# Altium PCB proto-rev0.PcbDoc (part 2 of 2)
Units mm, origin at the board's own origin, x right, y up, seen from the top; angles counter-clockwise.
Board outline 70 x 100 mm, 2 copper layers (Top Layer, Bottom Layer); 218 components, 156 nets, 639 pads, 222 vias.
Unrouted connection lines stored in the file: 43.
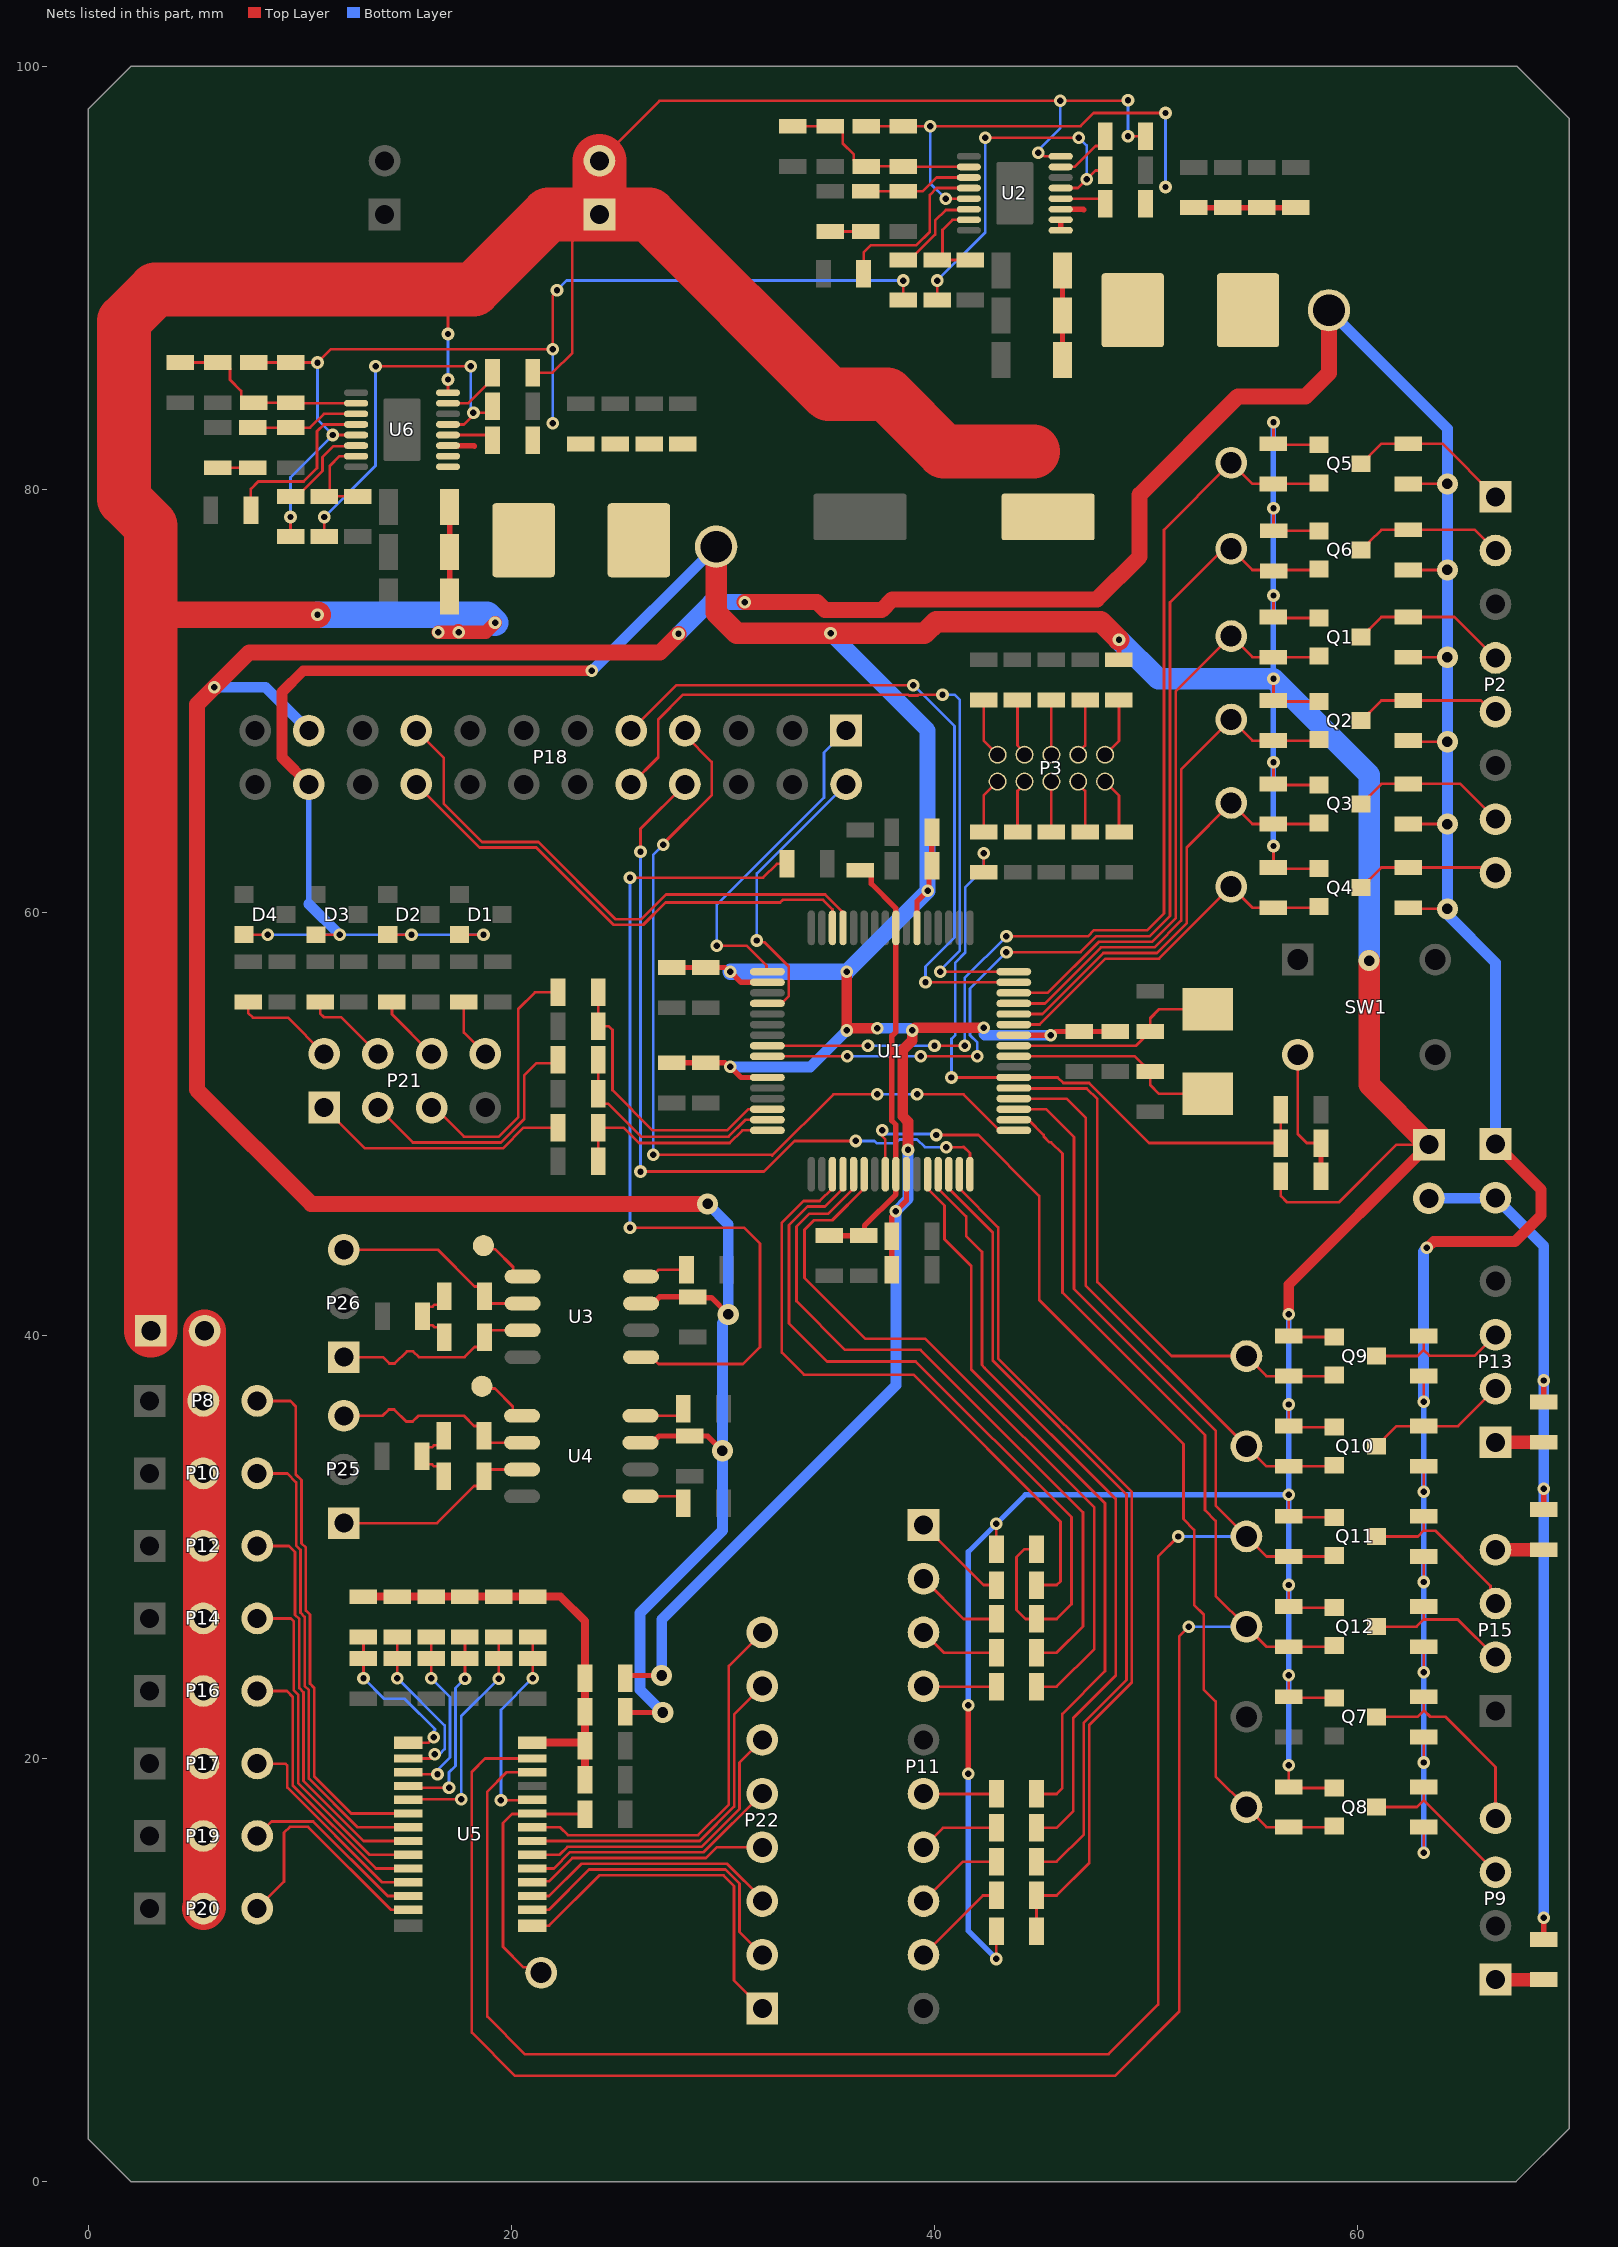
[diagram p2: the nets of this part, all layers, seen from the top]

## Via types
v1: diameter 0.6, hole 0.3, Top Layer to Bottom Layer, 204 vias
v2: diameter 1, hole 0.5, Top Layer to Bottom Layer, 14 vias
v3: diameter 5, hole 3.1, Top Layer to Bottom Layer, 4 vias

## Nets (pads, with @x,y where several pads share a name; then routed paths per layer and width w, separated by ;. In a path a pad name is that pad's centre, name@x,y a point inside that pad or via, vN(x,y) a via of type N, cw(c..) or ccw(c..) an arc to the next point about the centre after c; other vN are vias at no path point) (continued)
I2C1SDA: Q8.2 R44.1 TP10.1 U1.24 | length 48.5
  Top Layer w0.127: v1(37.525,49.7) 37.525,49.424 37.675,49.274 U1.24@37.675,47.625 ; v1(40.077,49.477) 42.073,49.477 44.95,46.6 44.95,41.691 51.772,34.869 51.772,31.323 52.28,30.815 52.28,27.268 52.728,26.82 52.728,23.274 53.296,22.706 53.296,19.159 TP10.1@54.75,17.705 55.7,16.755 R44.1@56.75,16.755 58.85,16.755 Q8.2@58.9,16.805
  Bottom Layer w0.127: v1(37.525,49.7) 37.525,49.525 40.029,49.525 v1(40.077,49.477)
I2C3SCL: Q9.2 R46.1 TP11.1 U1.37 | length 25.9
  Top Layer w0.127: U1.37@43.75,51.7 43.77,51.68 47.195,51.68 47.7,51.175 47.7,42.533 51.203,39.03 TP11.1@54.75,39.03 55.7,38.08 R46.1@56.75,38.08 Q9.2@58.9,38.08
I2C3SDA: Q10.2 R47.1 TP12.1 U1.36 | length 27
  Top Layer w0.127: U1.36@43.75,51.2 46.25,51.2 47.15,50.3 47.15,42.365 TP12.1@54.75,34.765 55.7,33.815 R47.1@56.75,33.815 Q10.2@58.9,33.815
I2C4SCL: Q11.2 R50.1 TP13.1 U1.35 U5.26 | length 102.5
  Top Layer w0.127: U5.26@20.975,19.35 19.775,19.35 18.858,18.433 18.858,7.792 20.625,6.025 48.232,6.025 50.575,8.368 50.575,29.55 v1(51.525,30.5) ; U1.35@43.75,50.7 45.275,50.7 46.6,49.375 46.6,42.197 53.296,35.501 53.296,31.954 TP13.1@54.75,30.5 55.7,29.55 R50.1@56.75,29.55 Q11.2@58.9,29.55
  Bottom Layer w0.127: v1(51.525,30.5) TP13.1@54.75,30.5
I2C4SDA: Q12.2 R52.1 TP14.1 U1.34 U5.27 | length 105.6
  Top Layer w0.127: U5.27@20.975,20 18.75,20 18.125,19.375 18.125,7.05 20.175,5 48.525,5 51.575,8.05 51.575,25.785 v1(52.025,26.235) ; U1.34@43.75,50.2 44.448,50.2 45.16,49.489 45.16,49.422 45.447,49.135 45.514,49.135 46.05,48.598 46.05,42.028 52.788,35.29 52.788,31.744 53.296,31.236 53.296,27.689 TP14.1@54.75,26.235 55.7,25.285 R52.1@56.75,25.285 58.85,25.285 Q12.2@58.9,25.335
  Bottom Layer w0.127: v1(52.025,26.235) TP14.1@54.75,26.235
INTVCC-3V3: C53.2 R94.2 U6.13 | length 18.4
  Top Layer w0.127: R94.2@11.153,77.774 v1(11.153,78.699) ; v1(13.575,85.825) v1(18.075,85.825) ; U6.13@16.996,83.074 17.758,83.074 18.308,83.624 19.103,83.624 C53.2@19.103,83.924
  Bottom Layer w0.127: v1(11.153,78.699) 13.575,81.121 v1(13.575,85.825) ; v1(18.075,85.825) 18.075,83.851 18.2,83.726 v1(18.2,83.625)
INTVCC-5V: C41.2 R85.2 U2.13 | length 17.6
  Top Layer w0.127: R85.2@40.125,88.952 v1(40.125,89.877) ; v1(42.4,96.627) v1(46.825,96.627) ; U2.13@45.968,94.252 46.775,94.252 v1(47.192,94.669) 47.609,95.085 48.059,95.085 C41.2@48.075,95.102
  Bottom Layer w0.127: v1(40.125,89.877) 42.4,92.152 v1(42.4,96.627) ; v1(46.825,96.627) 47.192,96.26 v1(47.192,94.669)
M1PWM0: P18.17 U1.61 | length 26.7
  Top Layer w0.127: P18.17@15.5,68.6 16.8,67.3 16.8,65.14 18.611,63.329 21.275,63.329 24.929,59.675 26.125,59.675 27.304,60.854 34.83,60.854 35.632,60.052 35.632,59.318 U1.61@35.675,59.275
M1PWM1: P18.18 U1.62 | length 24
  Top Layer w0.127: P18.18@15.5,66.06 18.485,63.075 21.17,63.075 24.824,59.421 26.23,59.421 27.284,60.475 32.7,60.475 32.825,60.6 34.725,60.6 35.175,60.15 U1.62@35.175,59.275
MODE-3V3: R94.1 R97.2 U6.7 | length 4.5
  Top Layer w0.127: U6.7@12.653,81.574 11.878,81.574 11.403,81.099 11.403,79.924 R94.1@11.153,79.674 R97.2@12.728,79.674
MODE-5V: R85.1 R88.2 U2.7 | length 4.5
  Top Layer w0.127: U2.7@41.625,92.752 40.85,92.752 40.375,92.277 40.375,91.102 R85.1@40.125,90.852 R88.2@41.7,90.852
NetC4_2: C4.2 R10.2 R15.2 U1.38 | length 30.5
  Top Layer w0.127: v1(40.8,52.2) U1.38@43.75,52.2 45.825,52.2 46.091,51.934 47.316,51.934 50.15,49.1 R15.2@56.322,49.1 ; R10.2@42.325,61.9 v1(42.325,62.8) ; R15.2@56.375,49.1 C4.2@56.375,50.675
  Bottom Layer w0.127: v1(40.8,52.2) 40.8,54.025 40.985,54.21 40.985,57.631 41.45,58.097 41.45,61.175 42.325,62.05 v1(42.325,62.8)
NetC13_1: C13.1 U1.40 Y1.1 | length 10.3
  Top Layer w0.127: U1.40@43.75,53.2 49.475,53.2 C13.1@50.2,52.475 50.2,51.85 50.625,51.425 Y1.1@52.925,51.425
NetC14_1: C14.1 U1.41 Y1.2 | length 10.3
  Top Layer w0.127: U1.41@43.75,53.7 49.525,53.7 C14.1@50.2,54.375 50.2,55 50.625,55.425 Y1.2@52.925,55.425
NetC28_1: C28.1 R76.1 R77.2 | length 3.2
  Top Layer w0.127: R76.1@16.825,39.925 16.825,40.105 16.538,40.391 16.359,40.391 16.266,40.484 16.087,40.484 15.8,40.77 C28.1@15.8,40.9 15.8,41.08 16.087,41.366 16.266,41.366 16.359,41.459 16.538,41.459 16.825,41.745 R77.2@16.825,41.85
NetC29_1: C29.1 R78.1 R79.2 | length 3.2
  Top Layer w0.127: R78.1@16.8,33.35 16.8,33.53 16.513,33.816 16.334,33.816 16.241,33.909 16.062,33.909 15.775,34.195 C29.1@15.775,34.3 15.775,34.425 16.062,34.711 16.241,34.711 16.334,34.804 16.513,34.804 16.8,35.09 R79.2@16.8,35.27
NetC30_1: C30.1 L1.1 U2.11 | length 1.1
  Top Layer w0.254: U2.11@45.968,93.252 47.025,93.252 47.05,93.227
NetC30_2: C30.2 U2.12 | length 2.2
  Top Layer w0.127: U2.12@45.968,93.752 47.825,93.752 C30.2@48.075,93.502
NetC39_1: C39.1 R87.2 | length 1.7
  Top Layer w0.127: R87.2@35.075,92.202 C39.1@36.75,92.202
NetC39_2: C39.2 C40.2 U2.3 | length 5.1
  Top Layer w0.127: C39.2@36.75,94.102 C40.2@38.525,94.102 39.45,94.102 40.1,94.752 U2.3@41.625,94.752
NetC42_1: C42.1 L2.1 U6.11 | length 1.3
  Top Layer w0.254: U6.11@16.996,82.074 18.226,82.074 18.25,82.05
NetC42_2: C42.2 U6.12 | length 2.2
  Top Layer w0.127: U6.12@16.996,82.574 18.853,82.574 C42.2@19.103,82.324
NetC51_1: C51.1 R96.2 | length 1.7
  Top Layer w0.127: R96.2@6.103,81.024 C51.1@7.778,81.024
NetC51_2: C51.2 C52.2 U6.3 | length 5.1
  Top Layer w0.127: C51.2@7.778,82.924 C52.2@9.553,82.924 10.478,82.924 11.128,83.574 U6.3@12.653,83.574
NetC54_1: C54.1 R81.1 R82.1 R83.1 U2.2 | length 9.6
  Top Layer w0.127: R83.1@33.3,97.177 R82.1@35.075,97.177 35.375,97.177 35.662,96.89 35.662,96.365 36.189,95.838 36.189,95.563 36.475,95.277 R81.1@36.775,95.277 C54.1@38.525,95.277 38.55,95.252 U2.2@41.625,95.252
NetC55_1: C55.1 R90.1 R91.1 R92.1 U6.2 | length 9.6
  Top Layer w0.127: R92.1@4.328,85.999 R91.1@6.103,85.999 6.403,85.999 6.69,85.713 6.69,85.188 7.217,84.661 7.217,84.386 7.503,84.099 R90.1@7.803,84.099 C55.1@9.553,84.099 9.578,84.074 U6.2@12.653,84.074
NetP2_1: P2.1 Q5.3 R35.2 | length 7.8
  Top Layer w0.127: Q5.3@60.175,81.215 60.225,81.215 60.562,81.552 60.562,81.602 61.125,82.165 R35.2@62.4,82.165 64.015,82.165 P2.1@66.525,79.655
NetP2_2: P2.2 Q6.3 R37.2 | length 7.2
  Top Layer w0.127: Q6.3@60.175,77.145 60.225,77.145 60.562,77.482 60.562,77.532 61.125,78.095 R37.2@62.4,78.095 65.545,78.095 P2.2@66.525,77.115
NetP2_4: P2.4 Q1.3 R27.2 | length 7.6
  Top Layer w0.127: Q1.3@60.175,73.02 60.225,73.02 60.562,73.357 60.562,73.407 61.125,73.97 R27.2@62.4,73.97 64.59,73.97 P2.4@66.525,72.035
NetP2_5: P2.5 Q2.3 R29.2 | length 7
  Top Layer w0.127: Q2.3@60.175,69.075 60.225,69.075 60.562,69.412 60.562,69.462 61.125,70.025 R29.2@62.4,70.025 65.83,70.025 66.36,69.495 P2.5@66.525,69.495
NetP2_7: P2.7 Q3.3 R31.2 | length 7.5
  Top Layer w0.127: Q3.3@60.175,65.13 60.225,65.13 60.562,65.467 60.562,65.517 61.125,66.08 R31.2@62.4,66.08 64.86,66.08 P2.7@66.525,64.415
NetP2_8: P2.8 Q4.3 R33.2 | length 6.9
  Top Layer w0.127: Q4.3@60.175,61.175 60.225,61.175 60.562,61.512 60.562,61.561 61.125,62.125 66.275,62.125 P2.8@66.525,61.875
NetP3_1: P3.1 R1.2 | length 2.9
  Top Layer w0.127: P3.1@48.065,67.46 48.722,68.117 R1.2@48.722,70.05
NetP3_2: P3.2 R2.1 | length 2.7
  Top Layer w0.127: P3.2@48.065,66.19 48.725,65.53 R2.1@48.725,63.8
NetP3_3: P3.3 R3.2 | length 2.7
  Top Layer w0.127: P3.3@46.795,67.46 46.795,67.569 47.122,67.896 R3.2@47.122,70.05
NetP3_4: P3.4 R4.1 | length 2.5
  Top Layer w0.127: P3.4@46.795,66.19 46.795,66.085 47.125,65.755 R4.1@47.125,63.8
NetP3_5: P3.5 R5.2 | length 2.6
  Top Layer w0.127: R5.2@45.522,70.05 45.522,67.463 P3.5@45.525,67.46
NetP3_6: P3.6 R6.1 | length 2.4
  Top Layer w0.127: R6.1@45.525,63.8 P3.6@45.525,66.19
NetP3_7: P3.7 R7.2 | length 2.7
  Top Layer w0.127: R7.2@43.922,70.05 43.922,67.892 44.255,67.559 P3.7@44.255,67.46
NetP3_8: P3.8 R8.1 | length 2.5
  Top Layer w0.127: R8.1@43.925,63.8 43.925,65.755 44.255,66.085 P3.8@44.255,66.19
NetP3_9: P3.9 R9.2 | length 2.9
  Top Layer w0.127: R9.2@42.322,70.05 42.322,68.123 P3.9@42.985,67.46
NetP3_10: P3.10 R10.1 | length 2.7
  Top Layer w0.127: R10.1@42.325,63.8 42.325,65.53 P3.10@42.985,66.19
NetP5_2: P5.2 P7.2 R11.1 R12.1 R13.1 | length 41.2
  Top Layer w0.254: R11.1@68.8,11.45 v1(68.8,12.475) ; R13.1@68.8,31.77 v1(68.8,32.75) ; R12.1@68.8,36.85 v1(68.8,37.875)
  Bottom Layer w0.508: P7.2@63.375,46.485 66.5,46.485 P5.2@66.525,46.51 68.8,44.235 v1(68.8,37.875) v1(68.8,32.75) v1(68.8,12.475)
NetP6_2: P6.2 P8.2 P10.2 P12.2 P14.2 P16.2 P17.2 P19.2 P20.2 | length 27.3
  Top Layer w2.032: P20.2@5.435,12.907 5.49,12.962 5.49,26.621 P6.2@5.49,40.225
NetP9_1: P9.1 R11.2 | length 2.3
  Top Layer w0.635: P9.1@66.525,9.55 R11.2@68.8,9.55
NetP9_3: P9.3 Q8.3 R45.2 | length 7.8
  Top Layer w0.127: Q8.3@60.9,17.705 62.805,17.705 63.125,18.025 63.125,18.03 ; R45.2@63.125,18.655 63.125,18.03 ; P9.3@66.525,14.63 63.125,18.03
NetP9_4: P9.4 Q7.3 R43.2 | length 10
  Top Layer w0.127: Q7.3@60.9,21.97 62.845,21.97 63.125,22.25 ; R43.2@63.125,22.92 63.125,22.25 ; P9.4@66.525,17.17 66.525,19.6 64.15,21.975 63.439,21.975 63.145,22.27 63.125,22.25
NetP11_1: P11.1 R21.2 | length 4.6
  Top Layer w0.127: P11.1@39.48,31.04 42.32,28.2 R21.2@42.925,28.2
NetP11_2: P11.2 R23.2 | length 4.2
  Top Layer w0.127: P11.2@39.48,28.5 41.38,26.6 R23.2@42.925,26.6
NetP11_3: P11.3 R24.2 | length 3.8
  Top Layer w0.127: P11.3@39.48,25.96 40.44,25 R24.2@42.925,25
NetP11_4: P11.4 R25.2 | length 3.5
  Top Layer w0.127: P11.4@39.48,23.42 39.5,23.4 R25.2@42.925,23.4
NetP11_6: P11.6 R16.2 | length 3.5
  Top Layer w0.127: P11.6@39.48,18.34 39.495,18.325 R16.2@42.925,18.325
NetP11_7: P11.7 R17.2 | length 3.8
  Top Layer w0.127: P11.7@39.48,15.8 40.405,16.725 R17.2@42.925,16.725
NetP11_8: P11.8 R18.2 | length 4.2
  Top Layer w0.127: P11.8@39.48,13.26 41.345,15.125 R18.2@42.925,15.125
NetP11_9: P11.9 R20.2 | length 4.6
  Top Layer w0.127: P11.9@39.48,10.72 42.285,13.525 R20.2@42.925,13.525
NetP13_1: P13.1 R12.2 | length 2.3
  Top Layer w0.635: P13.1@66.525,34.95 R12.2@68.8,34.95
NetP13_2: P13.2 Q10.3 R49.2 | length 6.8
  Top Layer w0.127: Q10.3@60.9,34.765 60.95,34.765 61.287,35.102 61.287,35.152 61.85,35.715 R49.2@63.125,35.715 64.75,35.715 P13.2@66.525,37.49
NetP13_3: P13.3 Q9.3 R48.2 | length 6.9
  Top Layer w0.127: Q9.3@60.9,39.03 62.83,39.03 63.125,39.325 ; R48.2@63.125,39.98 63.125,39.325 ; P13.3@66.525,40.03 65.545,39.05 63.4,39.05 63.125,39.325
NetP15_2: P15.2 Q12.3 R53.2 | length 7.1
  Top Layer w0.127: Q12.3@60.9,26.235 62.785,26.235 63.125,26.575 ; R53.2@63.125,27.185 63.125,26.575 ; P15.2@66.525,24.79 64.74,26.575 63.125,26.575
NetP15_3: P15.3 Q11.3 R51.2 | length 8.2
  Top Layer w0.127: Q11.3@60.9,30.5 62.85,30.5 63.125,30.775 ; R51.2@63.125,31.45 63.125,30.775 ; P15.3@66.525,27.33 66.284,27.571 66.284,28.166 63.675,30.775 63.125,30.775
NetP15_4: P15.4 R13.2 | length 2.3
  Top Layer w0.635: P15.4@66.525,29.87 R13.2@68.8,29.87
NetP21_1: P21.1 R59.1 | length 12.3
  Top Layer w0.127: P21.1@11.145,50.775 13.07,48.85 19.6,48.85 20.578,49.828 R59.1@22.203,49.828
NetP21_2: P21.2 R60.1 | length 4.9
  Top Layer w0.127: R60.1@7.55,55.775 7.55,55.25 7.775,55.025 9.435,55.025 P21.2@11.145,53.315
NetP21_3: P21.3 R57.1 | length 12
  Top Layer w0.127: P21.3@13.685,50.775 15.335,49.125 19.5,49.125 20.6,50.225 20.6,52.3 21.175,52.875 22.05,52.875 R57.1@22.203,53.028
NetP21_4: P21.4 R58.1 | length 4.1
  Top Layer w0.127: R58.1@10.953,55.772 10.953,55.222 11.125,55.05 11.95,55.05 P21.4@13.685,53.315
NetP21_5: P21.5 R55.1 | length 12.4
  Top Layer w0.127: P21.5@16.225,50.775 16.375,50.775 17.75,49.4 19.4,49.4 20.325,50.325 20.325,55.45 21.103,56.228 R55.1@22.203,56.228
NetP21_6: P21.6 R56.1 | length 3.2
  Top Layer w0.127: R56.1@14.35,55.775 14.35,55.19 P21.6@16.225,53.315
NetP21_8: P21.8 R54.1 | length 2.9
  Top Layer w0.127: R54.1@17.75,55.775 17.75,54.33 P21.8@18.765,53.315
NetP25_1: P25.1 R78.2 U4.7 | length 9.6
  Top Layer w0.127: P25.1@12.075,31.125 16.475,31.125 18.234,32.884 18.413,32.884 18.7,33.17 R78.2@18.7,33.35 18.7,33.379 18.987,33.665 U4.7@20.5,33.665
NetP25_3: P25.3 R79.1 U4.6 | length 9.6
  Top Layer w0.127: P25.3@12.05,36.205 13.9,36.205 14.2,36.505 14.45,36.505 15.025,35.93 15.325,35.93 15.6,36.205 17.75,36.205 18.234,35.721 18.413,35.721 18.7,35.435 18.7,35.255 18.7,35.222 18.987,34.935 U4.6@20.5,34.935
NetP26_1: P26.1 R76.2 U3.7 | length 9.6
  Top Layer w0.127: P26.1@12.075,38.975 13.925,38.975 14.225,38.675 14.475,38.675 15.05,39.25 15.35,39.25 15.625,38.975 17.775,38.975 18.259,39.459 18.439,39.459 18.725,39.745 R76.2@18.725,39.925 18.725,39.959 19.012,40.245 U3.7@20.525,40.245
NetP26_3: P26.3 R77.1 U3.6 | length 9.6
  Top Layer w0.127: P26.3@12.075,44.055 16.52,44.055 18.259,42.316 18.439,42.316 18.725,42.03 R77.1@18.725,41.85 18.725,41.802 19.012,41.515 U3.6@20.525,41.515
NetR14_1: R14.1 R15.1 SW1.3 | length 6.6
  Top Layer w0.127: SW1.3@57.175,53.275 57.175,49.525 57.6,49.1 R15.1@58.275,49.1
  Top Layer w0.254: R14.1@58.275,47.525 R15.1@58.275,49.1
NetR38_2: R38.2 U3.1 | length 41.5
  Top Layer w0.127: v1(25.6,45.1) 31,45.1 31.75,44.35 31.75,39.45 30.95,38.65 26.949,38.65 26.624,38.975 U3.1@26.125,38.975 ; v1@25.8,61.65 31.9,61.65 32.55,62.3 R38.2@33.025,62.3
  Bottom Layer w0.127: v1(25.6,45.1) v1(25.6,61.65)
NetR39_2: R39.2 U3.4 | length 2.3
  Top Layer w0.127: U3.4@26.125,42.785 26.624,42.785 26.949,43.11 R39.2@28.275,43.11
NetR40_2: R40.2 U4.1 | length 2.2
  Top Layer w0.127: U4.1@26.1,32.395 27.838,32.395 28.125,32.109 R40.2@28.125,32.07
NetR41_2: R41.2 U4.4 | length 2.2
  Top Layer w0.127: U4.4@26.1,36.205 27.838,36.205 28.125,36.492 R41.2@28.125,36.53
NetR61_2: R61.2 TP15.1 U5.23 | length 12.2
  Top Layer w0.127: TP15.1@21.4,9.875 21.149,10.126 20.574,10.126 19.6,11.1 19.6,16.95 20.025,17.375 R61.2@23.475,17.375
NetR62_1: R62.1 R63.1 U5.1 | length 8.1
  Top Layer w0.127: v1(13,23.8) R63.1@13,24.725 R62.1@13,25.75 ; U5.1@15.125,20.75 16.075,20.75 v1(16.325,21)
  Bottom Layer w0.127: v1(13,23.8) 13.975,22.825 14.95,22.825 16.4,21.375 16.325,21.3 v1(16.325,21)
NetR65_1: R65.1 R66.1 U5.2 | length 8.3
  Top Layer w0.127: v1(14.6,23.8) R66.1@14.6,24.725 R65.1@14.6,25.75 ; U5.2@15.125,20 16.4,20 16.375,20.025 v1(16.375,20.2)
  Bottom Layer w0.127: v1(14.6,23.8) 16.841,21.56 16.841,20.441 16.6,20.2 v1(16.375,20.2)
NetR67_1: R67.1 R68.1 U5.3 | length 8.5
  Top Layer w0.127: U5.3@15.125,19.35 15.225,19.25 v1(16.5,19.25) ; v1(16.2,23.8) R68.1@16.2,24.725 R67.1@16.2,25.75
  Bottom Layer w0.127: v1(16.2,23.8) 17.095,22.906 17.095,20.045 16.5,19.45 v1(16.5,19.25)
NetR70_1: R70.1 R71.1 U5.4 | length 9.4
  Top Layer w0.127: U5.4@15.125,18.7 15.2,18.625 v1(17.05,18.625) ; v1(17.8,23.775) R71.1@17.8,24.725 R70.1@17.8,25.75
  Bottom Layer w0.127: v1(17.05,18.625) 17.05,19.35 17.35,19.65 17.35,23.325 v1(17.8,23.775)
NetR72_1: R72.1 R73.1 U5.5 | length 10.9
  Top Layer w0.127: U5.5@15.125,18.05 15.15,18.075 v1(17.625,18.075) ; v1(19.4,23.775) R73.1@19.4,24.725 R72.1@19.4,25.75
  Bottom Layer w0.127: v1(17.625,18.075) 17.625,22 v1(19.4,23.775)
NetR74_1: R74.1 R75.1 U5.24 | length 9.8
  Top Layer w0.127: v1(19.5,18.025) 20.95,18.025 U5.24@20.975,18.05 ; v1(21,23.8) R75.1@21,24.725 R74.1@21,25.75
  Bottom Layer w0.127: v1(19.5,18.025) 19.5,22.3 v1(21,23.8)
NetR80_2: R80.2 U2.15 | length 2.8
  Top Layer w0.127: U2.15@45.968,95.252 46.625,95.252 47.609,96.235 47.788,96.235 48.075,96.522 R80.2@48.075,96.702
NetR86_2: R86.2 U2.4 | length 8.3
  Top Layer w0.127: R86.2@36.65,90.202 36.65,91.202 37,91.552 39.144,91.552 39.779,92.186 39.779,93.931 40.1,94.252 U2.4@41.625,94.252
NetR89_2: R89.2 U6.15 | length 2.9
  Top Layer w0.127: U6.15@16.996,84.074 17.953,84.074 19.103,85.224 R89.2@19.103,85.524
NetR95_2: R95.2 U6.4 | length 8.3
  Top Layer w0.127: R95.2@7.678,79.024 7.678,80.024 8.028,80.374 10.172,80.374 10.807,81.009 10.807,82.753 11.128,83.074 U6.4@12.653,83.074
NetTP7_1: TP7.1 U3.5 | length 2.6
  Top Layer w0.127: TP7.1@18.675,44.25 18.842,44.083 19.227,44.083 20.084,43.226 20.084,43.027 20.325,42.785 U3.5@20.525,42.785
NetTP8_1: TP8.1 U4.5 | length 2.6
  Top Layer w0.127: TP8.1@18.6,37.6 18.709,37.491 19.214,37.491 20.059,36.646 20.059,36.447 20.3,36.205 U4.5@20.5,36.205
P3V3-MAIN: C5.1 C6.1 C7.1 C8.1 C9.1 C10.1 C11.1 C12.1 C15.2 C16.2 C47.1 C48.1 C49.2 C50.2 C55.2 D1.2 D2.2 D3.2 D4.2 L2.2 P7.1 P18.22 Q1.1 Q2.1 Q3.1 Q4.1 Q5.1 Q6.1 Q7.1 Q8.1 Q9.1 Q10.1 Q11.1 Q12.1 R1.1 R14.2 R19.2 R22.2 R26.2 R28.2 R30.2 R32.2 R34.2 R36.2 R42.2 R44.2 R46.2 R47.2 R50.2 R52.2 R69.1 R84.2 R90.2 R93.2 TP17.1 U1.2 U1.11 U1.26 U1.42 U1.54 U6.5 | length 400.4
  Top Layer w0.127: D4.2@7.35,58.95 v1(8.475,58.95) ; R90.2@7.803,85.999 C55.2@9.553,85.999 v1(10.828,85.999) 11.453,86.624 v1(21.953,86.624) 21.953,89.164 22.148,89.359 v1(22.148,89.425) ; R93.2@9.553,77.774 v1(9.553,78.699) ; D3.2@10.753,58.947 v1(11.878,58.947) ; v1(11.553,82.574) U6.5@12.653,82.574 ; D2.2@14.15,58.95 v1(15.275,58.95) ; D1.2@17.55,58.95 v1(18.675,58.95) ; R84.2@38.525,88.952 v1(38.525,89.877) ; v1(42.925,10.525) R19.2@42.925,11.825 ; R22.2@42.925,29.9 v1(42.925,31.1) ; v1(56.025,63.145) R32.2@56.025,62.125 56.075,62.075 Q4.1@58.175,62.075 ; v1(56.025,67.1) R30.2@56.025,66.08 56.075,66.03 Q3.1@58.175,66.03 ; v1(56.025,71.045) R28.2@56.025,70.025 56.075,69.975 Q2.1@58.175,69.975 ; v1(56.025,74.99) R26.2@56.025,73.97 56.075,73.92 Q1.1@58.175,73.92 ; v1(56.025,79.115) 56.025,78.095 56.075,78.045 Q6.1@58.175,78.045 ; v1(56.025,83.185) R34.2@56.025,82.165 56.075,82.115 Q5.1@58.175,82.115 ; R14.2@56.375,47.525 56.375,46.6 56.675,46.3 59.125,46.3 61.85,49.025 P7.1@63.375,49.025 ; v1(56.75,19.675) R44.2@56.75,18.655 56.8,18.605 Q8.1@58.9,18.605 ; v1(56.75,23.94) R42.2@56.75,22.92 56.8,22.87 Q7.1@58.9,22.87 ; v1(56.75,28.205) R52.2@56.75,27.185 56.8,27.135 Q12.1@58.9,27.135 ; v1(56.75,32.47) R50.2@56.75,31.45 56.8,31.4 Q11.1@58.9,31.4 ; v1(56.75,36.735) R47.2@56.75,35.715 56.8,35.665 Q10.1@58.9,35.665 ; v1(56.75,41) R46.2@56.75,39.98 56.8,39.93 Q9.1@58.9,39.93
  Top Layer w0.254: R69.1@25.375,23.8 25.5,23.925 v2(27.1,23.925) ; C12.1@27.575,52.9 C11.1@29.175,52.9 30.083,52.9 30.283,52.7 v1(30.35,52.7) 30.85,52.2 U1.11@32.1,52.2 ; C15.2@27.575,57.4 C16.2@29.175,57.4 30.083,57.4 30.283,57.2 v1(30.35,57.2) 30.85,56.7 U1.2@32.1,56.7 ; C9.1@37.975,43.1 C10.1@37.975,44.7 37.975,45.608 38.175,45.808 v1(38.175,45.875) 38.675,46.375 U1.26@38.675,47.625 ; U1.54@39.175,59.275 39.175,60.525 v1(39.675,61.025) 39.741,61.091 39.741,62.066 C5.1@39.875,62.2 C6.1@39.875,63.8 ; v1(41.6,19.275) v1(41.6,22.525) ; U1.42@43.75,54.2 v1(45.5,54.2) 45.567,54.2 45.742,54.375 C7.1@46.85,54.375 C8.1@48.55,54.375 ; R1.1@48.722,71.95 v1(48.722,72.9)
  Top Layer w0.508: P18.22@10.42,66.06 9.15,67.33 9.15,70.425 10.15,71.425 v1(23.8,71.425) ; v1(35.85,57.2) v1(35.85,54.425) 35.95,54.525 v1(37.3,54.525) ; v1(38.75,48.775) 38.75,50.108 38.494,50.364 38.494,53.494 38.95,53.95 v1(38.95,54.425) 39.075,54.55 v1(42.325,54.55) ; v1(56.75,41) 56.75,42.4 P7.1@63.375,49.025
  Top Layer w1.016: TP17.1@29.678,77.298 29.678,74.172 30.65,73.2 v1(35.088,73.2) 39.525,73.2 40.075,73.75 47.872,73.75 v1(48.722,72.9) ; v2(60.55,57.725) 60.55,51.85 P7.1@63.375,49.025
  Bottom Layer w0.127: v1(8.475,58.95) 11.875,58.95 v1(11.878,58.947) 15.272,58.947 v1(15.275,58.95) v1(18.675,58.95) ; v1(9.553,78.699) 9.553,80.574 v1(11.553,82.574) 10.828,83.299 v1(10.828,85.999) ; v1(21.953,83.124) v1(21.953,86.624) ; v1(22.148,89.425) 22.6,89.877 v1(38.525,89.877)
  Bottom Layer w0.254: 10.42,60.405 P18.22@10.42,66.06 ; v1(41.6,19.275) 41.6,11.85 v1(42.925,10.525) ; v1(41.6,22.525) 41.6,29.775 v1(42.925,31.1) 44.295,32.47 v1(56.75,32.47) ; v1(56.025,63.145) v1(56.025,71.045) v1(56.025,83.185) ; v1(56.75,19.675) v1(56.75,23.94) v1(56.75,32.47) ; v1(56.75,41) v1(56.75,32.47)
  Bottom Layer w0.508: 10.42,60.405 v1@11.875,58.95 ; v1(23.8,71.425) 23.805,71.425 TP17.1@29.678,77.298 ; v2(27.1,23.925) 27.1,26.575 38.175,37.65 v1(38.175,45.875) 38.75,46.45 v1(38.75,48.775) ; v1(30.35,52.7) 34.125,52.7 v1(35.85,54.425) ; v1(37.3,54.525) 38.85,54.525 v1(38.95,54.425) ; v1(42.325,54.55) 42.325,54.25 42.375,54.2 v1(45.5,54.2)
  Bottom Layer w0.762: v1(30.35,57.2) v1(35.85,57.2) v1(39.675,61.025) 39.675,68.613 v1(35.088,73.2)
  Bottom Layer w1.016: v1(48.722,72.9) 50.577,71.045 v1(56.025,71.045) 60.55,66.52 v2(60.55,57.725)
P5V-MAIN: C17.2 C18.2 C35.1 C36.1 C37.2 C38.2 C54.2 L1.2 P5.1 P18.21 R27.1 R29.1 R31.1 R33.1 R35.1 R37.1 R43.1 R45.1 R48.1 R49.1 R51.1 R53.1 R64.2 R81.2 TP16.1 U2.5 U3.3 U4.3 | length 279.7
  Top Layer w0.127: R81.2@36.775,97.177 C54.2@38.525,97.177 v1(39.8,97.177) 46.9,97.177 47.525,97.802 v1(50.925,97.802) ; v1(40.525,93.752) U2.5@41.625,93.752 ; R33.1@62.4,60.172 v2(64.25,60.172) ; R31.1@62.4,64.18 v2(64.25,64.18) ; R29.1@62.4,68.072 v2(64.25,68.072) ; R27.1@62.4,72.07 v2(64.25,72.07) ; R37.1@62.4,76.195 v2(64.25,76.195) ; R35.1@62.4,80.265 v2(64.25,80.265) ; v1(63.125,15.55) R45.1@63.125,16.755 ; v1(63.125,19.815) R43.1@63.125,21.02 ; v1(63.125,24.08) R53.1@63.125,25.285 ; v1(63.125,28.345) R51.1@63.125,29.55 ; v1(63.125,32.61) R49.1@63.125,33.815 ; v1(63.125,36.875) R48.1@63.125,38.08
  Top Layer w0.254: R64.2@25.428,22.2 25.453,22.175 27.1,22.175 27.125,22.2 v2(27.15,22.175) ; U4.3@26.1,34.935 26.657,34.935 26.972,35.25 C17.2@28.425,35.25 29.275,35.25 v2(29.975,34.55) ; U3.3@26.125,41.515 26.687,41.515 26.997,41.825 C18.2@28.575,41.825 28.607,41.793 29.457,41.793 v2(30.25,41) ; C38.2@52.25,93.327 C37.2@53.875,93.327 C36.1@55.475,93.327 C35.1@57.075,93.327
  Top Layer w0.508: v1(63.275,44.15) 63.3,44.15 63.6,44.45 67.45,44.45 68.675,45.675 68.675,46.9 P5.1@66.525,49.05
  Top Layer w0.762: v1(27.9,73.175) 27.025,72.3 7.6,72.3 v1(5.95,70.65) 5.125,69.825 5.125,51.625 10.525,46.225 v2(29.275,46.225) ; v1(31.025,74.675) 34.45,74.675 34.825,74.3 37.5,74.3 38,74.8 47.675,74.8 49.7,76.825 49.7,79.75 54.35,84.4 57.55,84.4 58.65,85.5 TP16.1@58.65,88.475
  Bottom Layer w0.127: v1(39.8,97.177) 39.8,94.477 v1(40.525,93.752) ; v1(50.925,94.302) v1(50.925,97.802)
  Bottom Layer w0.254: v1(63.125,15.55) v1(63.125,24.08) v1(63.125,28.345) v1(63.125,32.61) v1(63.125,36.875)
  Bottom Layer w0.508: v1(5.95,70.65) 8.37,70.65 P18.21@10.42,68.6 ; v2(27.15,22.175) 26.075,23.25 26.075,26.875 29.975,30.775 v2(29.975,34.55) 29.975,40.592 30.25,40.867 v2(30.25,41) 30.25,45.25 v2(29.275,46.225) ; TP16.1@58.65,88.475 64.25,82.875 v2(64.25,80.265) 64.25,59.9 66.525,57.625 P5.1@66.525,49.05 ; v1(63.125,36.875) 63.125,43.975 63.275,44.125 v1(63.275,44.15)
  Bottom Layer w0.762: v1(27.9,73.175) 29.4,74.675 v1(31.025,74.675)
PGOOD-3V3: R93.1 U6.6 | length 4.5
  Top Layer w0.127: R93.1@9.553,79.674 9.853,79.674 11.061,80.882 11.061,81.532 11.567,82.038 12.616,82.038 U6.6@12.653,82.074
PGOOD-5V: R84.1 U2.6 | length 4.5
  Top Layer w0.127: R84.1@38.525,90.852 38.825,90.852 40.033,92.06 40.033,92.71 40.539,93.215 41.588,93.215 U2.6@41.625,93.252
PVBUS: C31.1 C32.2 C33.2 C34.2 C44.2 C45.2 C46.2 P6.1 P23.1 P23.2 R80.1 R89.1 U2.9 U2.10 U2.16 U6.9 U6.10 U6.16 | length 176.3
  Top Layer w0.127: U6.16@16.996,84.574 v1(16.996,85.2) ; v1(16.996,87.35) 16.996,88.246 18.2,89.45 ; R89.1@21.003,85.524 21.949,85.524 22.875,86.45 22.875,91.715 P23.1@24.16,93 ; P23.2@24.16,95.54 26.995,98.375 v1(45.95,98.375) 49.125,98.375 v1(49.15,98.4) ; v1(44.9,95.925) 45.028,95.925 45.201,95.752 U2.16@45.968,95.752 ; v1(49.15,96.702) R80.1@49.975,96.702
  Top Layer w0.254: C46.2@17.078,74.949 C45.2@17.078,77.049 C44.2@17.078,79.174 ; U2.9@45.968,92.252 U2.10@45.968,92.752 ; C34.2@46.05,86.127 C33.2@46.05,88.227 C32.2@46.05,90.352
  Top Layer w0.635: v1(16.537,73.25) v1(17.5,73.25) ; v1@17.475,73.325 17.55,73.25 18.775,73.25 v1(19.225,73.7)
  Top Layer w1.27: 2.95,74.075 v1(10.825,74.075)
  Top Layer w2.54: P6.1@2.95,40.225 2.95,74.075 2.95,78.275 1.675,79.55 1.675,87.962 3.163,89.45 18.2,89.45 21.75,93 P23.1@24.16,93 ; P23.2@24.16,95.54 P23.1@24.16,93 ; 44.675,81.8 40.45,81.8 37.75,84.5 35,84.5 26.5,93 P23.1@24.16,93
  Bottom Layer w0.127: v1(16.996,85.2) v1(16.996,87.35) ; v1(44.9,95.925) 44.9,96.03 45.95,97.08 v1(45.95,98.375) ; v1(49.15,96.702) v1(49.15,98.4)
  Bottom Layer w1.27: v1(10.825,74.075) 18.85,74.075 v1(19.225,73.7)
PWM0: P8.3 U5.6 | length 25
  Top Layer w0.127: P8.3@7.975,36.907 7.982,36.9 9.55,36.9 9.8,36.65 9.8,33.434 10.075,33.159 10.075,30.168 10.275,29.968 10.275,27.003 10.475,26.803 10.475,23.537 10.675,23.337 10.675,19.15 12.425,17.4 U5.6@15.125,17.4
PWM1: P10.3 U5.7 | length 21.9
  Top Layer w0.127: P10.3@7.975,33.479 7.979,33.475 9.4,33.475 9.821,33.054 9.821,30.063 10.021,29.863 10.021,26.897 10.221,26.697 10.221,23.432 10.421,23.232 10.421,19.045 12.716,16.75 U5.7@15.125,16.75
PWM2: P12.3 U5.8 | length 19
  Top Layer w0.127: P12.3@7.975,30.05 9.475,30.05 9.767,29.758 9.767,26.792 9.967,26.592 9.967,23.326 10.167,23.126 10.167,18.94 13.007,16.1 U5.8@15.125,16.1
PWM3: P14.3 U5.9 | length 16.1
  Top Layer w0.127: P14.3@7.975,26.621 9.579,26.621 9.713,26.487 9.713,23.221 9.913,23.021 9.913,18.834 13.297,15.45 U5.9@15.125,15.45
PWM4: P16.3 U5.10 | length 13.1
  Top Layer w0.127: P16.3@7.975,23.193 9.382,23.193 9.659,22.916 9.659,18.725 13.584,14.8 U5.10@15.125,14.8
PWM5: P17.3 U5.11 | length 10.1
  Top Layer w0.127: P17.3@7.975,19.764 7.989,19.75 9.325,19.75 9.405,19.67 9.405,18.62 13.875,14.15 U5.11@15.125,14.15
PWM6: P19.3 U5.12 | length 8.9
  Top Layer w0.127: P19.3@7.975,16.336 8.664,17.025 10.625,17.025 14.15,13.5 U5.12@15.125,13.5
PWM7: P20.3 U5.13 | length 11.7
  Top Layer w0.127: P20.3@7.975,12.907 9.245,14.177 9.245,16.495 9.521,16.771 10.379,16.771 14.3,12.85 U5.13@15.125,12.85
PWM8: P22.1 U5.15 | length 17.1
  Top Layer w0.127: U5.15@20.975,12.1 21.775,12.1 24.15,14.475 30.025,14.475 30.525,13.975 30.525,9.515 P22.1@31.86,8.18
PWM9: P22.2 U5.16 | length 14.7
  Top Layer w0.127: U5.16@20.975,12.85 21.775,12.85 23.675,14.75 30.109,14.75 30.779,14.08 30.779,11.801 P22.2@31.86,10.72
PWM10: P22.3 U5.17 | length 12.3
  Top Layer w0.127: U5.17@20.975,13.5 21.775,13.5 23.3,15.025 30.193,15.025 31.86,13.358 P22.3@31.86,13.26
PWM11: P22.4 U5.18 | length 11.6
  Top Layer w0.127: U5.18@20.975,14.15 21.016,14.191 21.766,14.191 22.875,15.3 29.2,15.3 29.712,15.812 31.848,15.812 P22.4@31.86,15.8
PWM12: P22.5 U5.19 | length 12.4
  Top Layer w0.127: U5.19@20.975,14.8 22,14.8 22.771,15.571 29.091,15.571 P22.5@31.86,18.34
PWM13: P22.6 U5.20 | length 14.4
  Top Layer w0.127: U5.20@20.975,15.45 22.275,15.45 22.65,15.825 28.986,15.825 30.783,17.622 30.783,19.803 P22.6@31.86,20.88
PWM14: P22.7 U5.21 | length 16.5
  Top Layer w0.127: U5.21@20.975,16.1 28.902,16.1 30.529,17.727 30.529,22.089 P22.7@31.86,23.42
PWM15: P22.8 U5.22 | length 18.8
  Top Layer w0.127: U5.22@20.975,16.75 22.3,16.75 22.675,16.375 28.817,16.375 30.275,17.833 30.275,24.375 P22.8@31.86,25.96
QEI-IDX1: C24.2 R59.2 U1.16 | length 10.1
  Top Layer w0.127: C24.2@24.103,48.228 R59.2@24.103,49.828 25.297,49.828 26.025,49.1 30.318,49.1 30.918,49.7 U1.16@32.1,49.7
QEI-PHA1: C22.2 R57.2 U1.15 | length 10.9
  Top Layer w0.127: R57.2@24.103,53.028 C22.2@24.103,51.428 24.103,51.248 24.389,50.962 24.569,50.962 26.131,49.4 30.259,49.4 31.059,50.2 U1.15@32.1,50.2
QEI-PHB1: C20.2 R55.2 U1.14 | length 13.7
  Top Layer w0.127: R55.2@24.103,56.228 C20.2@24.103,54.628 24.597,54.628 24.775,54.45 24.775,51.6 26.675,49.7 30.2,49.7 31.2,50.7 U1.14@32.1,50.7
SSI0CLK: R21.1 U1.19 | length 30.4
  Top Layer w0.127: U1.19@35.175,47.625 35.175,46.958 34.572,46.356 33.806,46.356 32.783,45.333 32.783,39.192 33.825,38.15 39,38.15 45.955,31.195 45.955,28.38 45.775,28.2 R21.1@44.825,28.2
SSI0FSS: R22.1 R23.1 U1.20 | length 36.5
  Top Layer w0.127: U1.20@35.675,47.625 35.675,46.958 34.818,46.102 34.002,46.102 33.125,45.225 33.125,40.575 34.925,38.775 39.111,38.775 46.475,31.411 46.475,27.3 45.775,26.6 R23.1@44.825,26.6 44.3,26.6 43.875,27.025 43.875,29.525 44.25,29.9 R22.1@44.825,29.9
SSI0RX: R24.1 U1.21 | length 33.4
  Top Layer w0.127: U1.21@36.175,47.625 36.175,46.958 34.967,45.75 34.075,45.75 33.475,45.15 33.475,41.625 35.775,39.325 39.339,39.325 47.025,31.638 47.025,26.25 45.775,25 R24.1@44.825,25
SSI0TX: R25.1 U1.22 | length 34.9
  Top Layer w0.127: U1.22@36.675,47.625 36.675,46.958 35.167,45.45 34.3,45.45 33.85,45 33.85,42.725 36.721,39.854 39.558,39.854 40.897,38.515 47.554,31.858 47.554,25.179 45.775,23.4 R25.1@44.825,23.4
SSI1CLK: R18.1 U1.30 | length 38.3
  Top Layer w0.127: U1.30@40.675,47.625 40.675,46.95 42.754,44.871 42.754,38.814 49.079,32.489 49.079,23.71 47.062,21.694 47.062,16.412 45.775,15.125 R18.1@44.825,15.125
SSI1FSS: R19.1 R20.1 U1.31 | length 41.6
  Top Layer w0.127: U1.31@41.175,47.625 41.175,46.95 43.008,45.117 43.008,38.919 49.333,32.594 49.333,23.605 47.316,21.588 47.316,15.066 45.775,13.525 R20.1@44.825,13.525 R19.1@44.825,11.825
SSI1RX: R16.1 U1.28 | length 34.7
  Top Layer w0.127: U1.28@39.675,47.625 39.675,46.95 40.475,46.15 40.475,44.55 41.738,43.287 41.738,38.393 41.95,38.181 48.063,32.068 48.063,24.131 46.046,22.114 46.046,18.596 45.775,18.325 R16.1@44.825,18.325
SSI1TX: R17.1 U1.29 | length 36.5
  Top Layer w0.127: U1.29@40.175,47.625 40.175,46.95 41.5,45.625 41.5,44.7 42.246,43.954 42.246,38.603 42.375,38.474 48.571,32.278 48.571,23.921 46.554,21.904 46.554,17.504 45.775,16.725 R17.1@44.825,16.725
TIMER0CCP0: P18.1 U1.1 | length 15.8
  Top Layer w0.127: v1(29.7,58.425) 31.125,58.425 32.059,57.491 32.059,57.241 U1.1@32.1,57.2
  Bottom Layer w0.127: v1(29.7,58.425) 29.7,60.35 34.779,65.429 34.779,67.559 P18.1@35.82,68.6
TIMER0CCP1: P18.2 U1.4 | length 13.7
  Top Layer w0.127: v1(31.602,58.678) 31.686,58.593 31.957,58.593 33.115,57.435 33.115,56.049 32.767,55.7 U1.4@32.1,55.7
  Bottom Layer w0.127: v1(31.602,58.678) 31.602,61.842 P18.2@35.82,66.06
TIMER3CCP0: P18.9 U1.47 | length 33.8
  Top Layer w0.127: P18.9@25.66,68.6 27.81,70.75 v1(39,70.75) ; v1(39.575,56.7) U1.47@43.75,56.7
  Bottom Layer w0.127: v1(39,70.75) 40.942,68.808 40.942,58.817 39.575,57.45 v1(39.575,56.7)
TIMER3CCP1: P18.10 U1.48 | length 35.2
  Top Layer w0.127: P18.10@25.66,66.06 26.94,67.34 26.94,69.125 28.115,70.3 38.756,70.3 38.797,70.26 39.203,70.26 39.244,70.3 v1(40.375,70.3) ; v1(40.275,57.2) U1.48@43.75,57.2
  Bottom Layer w0.127: v1(40.275,57.2) 40.275,57.281 41.196,58.202 41.196,70.054 40.95,70.3 v1(40.375,70.3)
TIVA-VDDC: C1.2 C2.2 C3.1 U1.25 U1.56 | length 20.6
  Top Layer w0.254: C2.2@35.025,44.725 C3.1@36.65,44.725 36.691,44.766 36.691,45.191 38.175,46.675 U1.25@38.175,47.625 38.175,49.964 37.986,50.153 37.986,54.168 38.175,54.357 U1.56@38.175,59.275 38.161,59.289 38.161,60.214 37.015,61.36 37.015,61.777 36.792,62 C1.2@36.5,62
UART1RX: Q2.2 R28.1 TP2.1 U1.45 | length 24.9
  Top Layer w0.127: U1.45@43.75,55.7 45.225,55.7 47.875,58.35 50.4,58.35 ; 50.588,58.538 50.4,58.35 ; Q2.2@58.175,68.175 58.125,68.125 R28.1@56.025,68.125 55.025,68.125 TP2.1@54.025,69.125 51.665,66.765 51.665,59.615 50.4,58.35
UART1TX: Q1.2 R26.1 TP1.1 U1.46 | length 30.3
  Top Layer w0.127: U1.46@43.75,56.2 45.35,56.2 47.765,58.615 50.29,58.615 ; 48.25,58.615 50.29,58.615 ; 50.401,58.726 50.29,58.615 ; Q1.2@58.175,72.12 58.125,72.07 R26.1@56.025,72.07 55.025,72.07 TP1.1@54.025,73.07 51.4,70.445 51.4,59.725 50.29,58.615
UART6RX: Q4.2 R32.1 TP4.1 U1.43 | length 17.6
  Top Layer w0.127: U1.43@43.75,54.7 44.975,54.7 48.095,57.82 48.25,57.82 50.62,57.82 TP4.1@54.025,61.225 55.025,60.225 R32.1@56.025,60.225 58.125,60.225 Q4.2@58.175,60.275
UART6TX: Q3.2 R30.1 TP3.1 U1.44 | length 21.2
  Top Layer w0.127: U1.44@43.75,55.2 45.1,55.2 47.985,58.085 48.25,58.085 50.51,58.085 51.93,59.505 51.93,63.085 TP3.1@54.025,65.18 55.025,64.18 R30.1@56.025,64.18 Q3.2@58.125,64.18 ; Q3.2@58.125,64.18 Q3.2@58.175,64.23 Q3.2@58.125,64.18
UART7RX: Q6.2 R36.1 TP6.1 U1.9 | length 47.6
  Top Layer w0.127: U1.9@32.1,53.2 32.103,53.203 v1(35.877,53.203) ; v1(39.35,53.2) v1(42.025,53.2) ; v1(43.4,58.125) 46.9,58.125 47.655,58.88 50.18,58.88 ; 50.213,58.913 50.18,58.88 ; Q6.2@58.175,76.245 58.125,76.195 55.025,76.195 TP6.1@54.025,77.195 53.665,77.195 51.135,74.665 51.135,59.835 50.18,58.88
  Bottom Layer w0.127: v1(35.877,53.203) 39.347,53.203 v1(39.35,53.2) ; v1(42.025,53.2) 42.025,53.85 41.679,54.196 41.679,56.404 v1(43.4,58.125)
UART7TX: Q5.2 R34.1 TP5.1 U1.8 | length 50.4
  Top Layer w0.127: U1.8@32.1,53.7 32.103,53.703 v1(36.852,53.703) ; v1(40,53.7) v1(41.425,53.7) ; v1(43.4,58.875) 47.25,58.875 47.538,59.163 50.063,59.163 50.852,59.952 50.852,78.092 TP5.1@54.025,81.265 55.025,80.265 R34.1@56.025,80.265 58.125,80.265 Q5.2@58.175,80.315
  Bottom Layer w0.127: v1(36.852,53.703) 39.997,53.703 v1(40,53.7) ; v1(41.425,53.7) 41.425,56.9 v1(43.4,58.875)
VDD_PCA: C26.1 C27.2 R62.2 R64.1 R65.2 R67.2 R69.2 R70.2 R72.2 R74.2 U5.28 | length 21
  Top Layer w0.381: R62.2@13,27.65 R74.2@21,27.65 22.325,27.65 23.475,26.5 R69.2@23.475,23.8 R64.1@23.475,22.2 C26.1@23.475,20.6 ; U5.28@20.975,20.75 23.325,20.75 C26.1@23.475,20.6 ; C27.2@23.475,19 C26.1@23.475,20.6
WT0CCP0: P18.7 U1.33 | length 40.7
  Top Layer w0.127: v1(26.7,48.55) 32.275,48.55 32.325,48.5 35.225,51.4 v1(37.3,51.4) ; v1(27.175,63.2) 27.175,63.25 29.465,65.54 29.465,67.125 28.2,68.39 P18.7@28.2,68.6 ; v1(39.177,51.403) 41.381,51.403 43.083,49.7 U1.33@43.75,49.7
  Bottom Layer w0.127: v1(26.7,48.55) 26.7,62.725 v1(27.175,63.2) ; v1(37.3,51.4) 37.303,51.403 v1(39.177,51.403)
WT0CCP1: P18.8 U1.32 | length 36.8
  Top Layer w0.127: v1(26.1,47.75) 31.934,47.75 33.384,49.2 v1(36.275,49.2) ; v1(26.1,62.875) 26.1,63.96 P18.8@28.2,66.06 ; v1(40.552,48.902) 41.352,48.902 41.375,48.925 41.675,48.625 U1.32@41.675,47.625
  Bottom Layer w0.127: v1(26.1,47.75) v1(26.1,62.875) ; v1(36.275,49.2) 37.166,49.2 37.281,49.084 38.163,49.084 38.35,49.271 39.175,49.271 39.543,48.902 v1(40.552,48.902)
pads on no net: R7.1 SW1.2 SW1.4 U2.8 U5.25 U6.8

## Polygon pours and split planes (outlines as drawn)
PVBUS on Top Layer "NONET_L01_P002" (solid, remove dead copper, shelved, pour order 2): 45,92.902 47,92.902 47,81 48.7,81 48.7,76.25 42,76.25 42,81 45,81
PVBUS on Top Layer "NONET_L01_P008" (solid, remove dead copper, shelved, pour order 8): 16.028,81.724 18.028,81.724 18.028,72.923 16.028,72.923 16.028,80.324
GND on Top Layer "NONET_L01_P006" (solid, remove dead copper, shelved, pour order 6): 15.678,84.299 13.953,84.299 13.953,77.274 12,77.274 12,73.499 15.678,73.499
P3V3-MAIN on Top Layer (solid, remove dead copper, shelved, pour order 14): 21.603,81.949 23.153,80.399 23.153,74.649 31.403,74.649 31.403,80.874 29.078,83.199 21.603,83.199
P5V-MAIN on Top Layer (solid, remove dead copper, shelved, pour order 12): 50.575,93.127 52.125,91.577 52.125,85.827 60.375,85.827 60.375,92.052 58.05,94.377 50.575,94.377
GND on Top Layer "NONET_L01_P004" (solid, remove dead copper, shelved, pour order 4): 44.65,95.477 42.925,95.477 42.925,88.452 40.825,88.452 40.825,84.677 44.65,84.677
NetC42_1 on Top Layer "NONET_L01_P010" (solid, shelved, pour order 10): 16.328,81.924 17.778,81.924 17.778,81.949 17.878,81.949 18.178,81.645 18.178,75.324 18.828,74.674 22.003,74.674 22.703,75.374 22.703,80.324 21.353,81.674 20.653,81.674 20.403,81.424 18.628,81.449 18.628,82.199 16.328,82.199
NetC30_1 on Top Layer "NONET_L01_P000" (solid, shelved, pour order 0): 45.3,93.102 46.75,93.102 46.75,93.127 46.926,93.127 47.25,92.797 47.25,85.852 51.825,85.852 51.825,91.352 50.325,92.852 49.625,92.852 49.375,92.602 47.6,92.627 47.6,93.377 45.3,93.377
GND on Bottom Layer "GND-BOTTOM-PLANE" (solid, remove dead copper, shelved, pour order 16): 0,0 70,0 70,100 0,100

## Other copper
Top Layer:
  pour cut-out: 45.075,92.927

## Silkscreen, mask and mechanical layers (free items; w line width, h text height)
Top Overlay:
  lines w0.254: 4.45,44.95 4.5,57.25 6.475,57.25 ; 11.925,28 11.925,9.75 16.625,9.75 ; 33.45,88.2 42.25,88.175 ; 40.45,84.775 47.125,84.775 47.125,90.45 ; 41.75,64.5 49.25,64.5 49.25,66 49.75,66 49.75,60.75 ; 41.75,72.75 48,72.75 48,74 49.5,74 49.5,80.25 ; 47.8,92.4 60.675,92.4 ; 60.75,91.25 60.75,83.5 63.5,83.5 63.5,60 ; 61,8 61,14.5 64.25,14.5 64.25,39.75

## Text inside footprints (layer, text, board x,y; h text height)
C31: Top Overlay "-" at 33.559,80.224 h1.52; Top Overlay "+" at 46.767,80.351 h1.52